# EAGLE board Powerful Crift (EAGLE 9.7.0)

Size 176.28 x 59.69 mm. Coordinates in mm from the lower left corner, seen from the top.
Outline: 0,0 176.28,0 176.28,59.69 0,59.69 0,0
Copper layers (1*16): Top 0.035mm / dielectric 1.5mm / Bottom 0.035mm
Design rules "default": minimum track width 6mil, minimum drill 0.35mm, track to track 6mil, track to pad 6mil, pad to pad 6mil, via to via 6mil, smd to smd 6mil, copper to edge 40mil, drill to drill 6mil, minimum pad ring 10mil, minimum via ring 8mil, stop-mask expansion 4mil, vias tented up to drill 0mil, thermal gap 10mil

## Footprints (pad centres in the part's own frame; a part is rotated, then mirrored left to right if it is on the bottom)
LEDRD254W60D565H860B = drill 0.981 pad 1.581: 1 -1.27,0; 2 1.27,0
LEDRD254W60D565H860B_G = drill 0.981 pad 1.581: 1 -1.27,0; 2 1.27,0
LEDRD254W60D565H860B_Y = drill 0.981 pad 1.581: 1 -1.27,0; 2 1.27,0
RESAD1016W63L850D250B = drill 0.83 pad 1.43: 1 -5.08,0; 2 5.08,0
SWITCH-MOMENTARY-PTH-6.5MM = drill 1.016 pad 1.88: 1 -3.251,2.261; 2 3.251,2.261; 3 -3.251,-2.261; 4 3.251,-2.261
ARDUINO-UNO-R3-SHIELD = drill 1.016 pad 1.88: 3.3V 24.13,-2.54; 5V 24.13,0; A0 24.13,12.7; A1 24.13,15.24; A2 24.13,17.78; A3 24.13,20.32; A4 24.13,22.86; A5 24.13,25.4; AREF -24.13,-13.97; D2 -24.13,20.32; D3 -24.13,17.78; D4 -24.13,15.24; D5 -24.13,12.7; D6 -24.13,10.16; D7 -24.13,7.62; D8 -24.13,3.81; D9 -24.13,1.27; D10 -24.13,-1.27; D11 -24.13,-3.81; D12 -24.13,-6.35; D13 -24.13,-8.89; GND@0 24.13,2.54; GND@1 24.13,5.08; GND@2 -24.13,-11.43; IOREF 24.13,-7.62; NC 24.13,-10.16; RES 24.13,-5.08; RX -24.13,25.4; SCL -24.13,-19.05; SDA -24.13,-16.51; TX -24.13,22.86; VIN 24.13,7.62

## Placement (x,y rotation side)
D1  RED  [LEDRD254W60D565H860B]  154.98,34.13 180 top
D2  GREEN  [LEDRD254W60D565H860B_G]  162.6,34.13 180 top
D3  YELLOW  [LEDRD254W60D565H860B_Y]  170.22,34.13 180 top
R1  220  [RESAD1016W63L850D250B]  153.71,49.37 90 top
R2  220  [RESAD1016W63L850D250B]  161.33,49.37 90 top
R3  220  [RESAD1016W63L850D250B]  168.95,49.37 90 top
R4  10k  [RESAD1016W63L850D250B]  125.77,11.27 90 top
R5  10k  [RESAD1016W63L850D250B]  135.93,11.27 90 top
R6  10k  [RESAD1016W63L850D250B]  146.09,11.27 90 top
S1  SWITCH_MOMENTARY  [SWITCH-MOMENTARY-PTH-6.5MM]  123.23,30.32 90 top
S2  SWITCH_MOMENTARY  [SWITCH-MOMENTARY-PTH-6.5MM]  133.39,30.32 90 top
S3  SWITCH_MOMENTARY  [SWITCH-MOMENTARY-PTH-6.5MM]  143.55,30.32 90 top
U1  ARDUINO-UNO-R3-SHIELD  [ARDUINO-UNO-R3-SHIELD]  47.88,29.84 270 top

## Library data of the parts
D1 = Tinkercad; CATEGORY: Opto-Electronic; SUB-CATEGORY: LED; VALUE: LED_RED
D2 = Tinkercad; CATEGORY: Opto-Electronic; SUB-CATEGORY: LED; VALUE: LED_GREEN
D3 = Tinkercad; CATEGORY: Opto-Electronic; SUB-CATEGORY: LED; VALUE: LED_YELLOW
R1-R6 S1-S3 U1 = Tinkercad

## Nets
D1_C: D1.2 R1.1
D2_C: D2.2 R2.1
D3_C: D3.2 R3.1
U1_5V: R4.1 R5.1 R6.1 U1.5V
U1_D3: D1.1 U1.D3
U1_D4: D2.1 U1.D4
U1_D5: D3.1 U1.D5
U1_D8: R4.2 S1.3 S1.4 U1.D8
U1_D9: R5.2 S2.3 S2.4 U1.D9
U1_D10: R6.2 S3.3 S3.4 U1.D10
U1_GND: R1.2 R2.2 R3.2 S1.1 S1.2 S2.1 S2.2 S3.1 S3.2 U1.GND@0 U1.GND@1 U1.GND@2

## Tracks (layer width: path | path; a pad name or v marks a point on that pad's centre or on a via)
D1_C  (1 unrouted)
D2_C  (1 unrouted)
D3_C  (1 unrouted)
U1_5V  (3 unrouted)
U1_D3  (1 unrouted)
U1_D4  (1 unrouted)
U1_D5  (1 unrouted)
U1_D8  (3 unrouted)
U1_D9  (3 unrouted)
U1_D10  (3 unrouted)
U1_GND  (11 unrouted)